# EAGLE board radiosonde_lite_final (EAGLE 9.6.2)
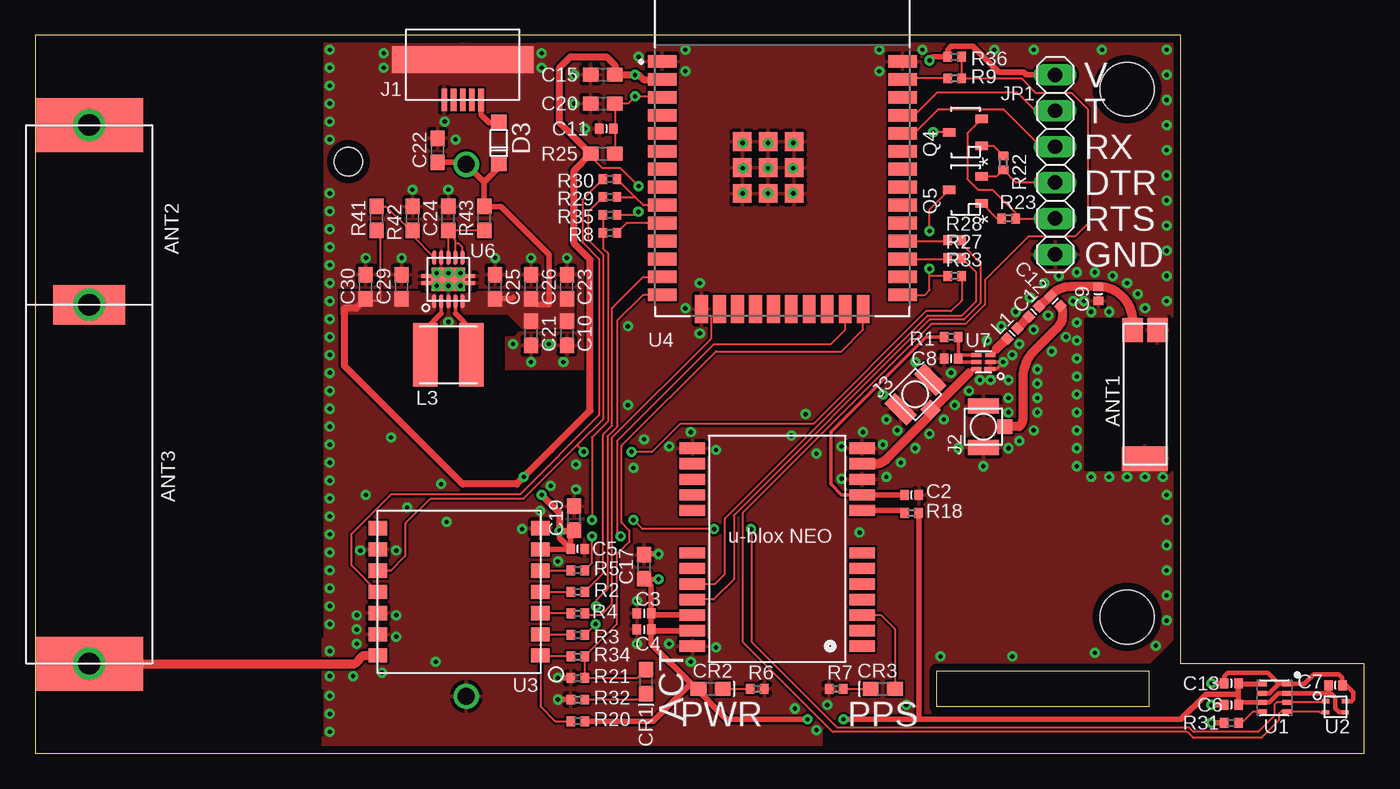
[diagram p0: board, top side]
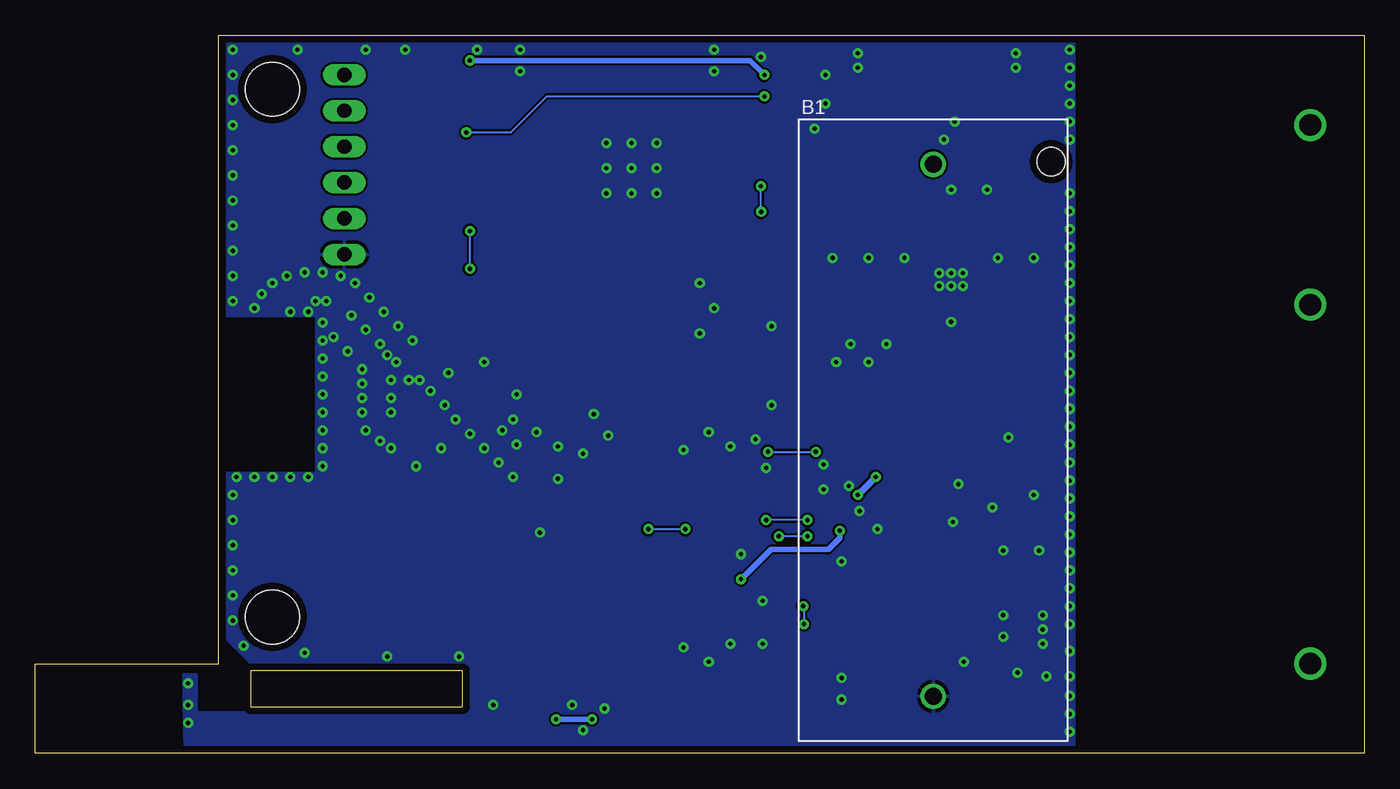
[diagram p1: board, bottom side, seen from below]

Size 93.98 x 50.8 mm. Coordinates in mm from the lower left corner, seen from the top.
Outline: 0,0 93.98,0 93.98,6.35 81.03,6.35 81.03,50.8 0,50.8 0,0
Outline: 78.74,5.84 78.74,3.3 63.75,3.3 63.75,5.84 78.74,5.84
Copper layers (1*16): Top 0.035mm / dielectric 1.5mm / Bottom 0.035mm
Design rules "default *": minimum track width 6mil, minimum drill 10mil, track to track 6mil, track to pad 6mil, pad to pad 6mil, via to via 6mil, smd to smd 6mil, copper to edge 20mil, drill to drill 6mil, minimum pad ring 10mil, minimum via ring 8mil, stop-mask expansion 4mil, vias tented up to drill 12mil, thermal gap 10mil
Net classes: 1 HV: clearance 0.406 mm
Holes 3.81 mm at 77.22,46.99 77.22,9.65
tRestrict: area 28.7,25.9 to 29.7,30; 8 lines
bRestrict: 1 lines

## Footprints (pad centres in the part's own frame; a part is rotated, then mirrored left to right if it is on the bottom)
W3010 = smd 1.7 x 3.2: P$1 -4.55,0 | smd 1.7 x 1.45: P$2 4.55,0.875; P$3 4.55,-0.875
ANT-433-HETH = drill 1.524: IN1 -19.05,0; NC1 19.05,0 | smd 3.81 x 7.62: IN2 -19.05,0; NC2 19.05,0
ANT-916-HETH = drill 1.524: IN1 -12.7,0; NC1 12.7,0 | smd 2.794 x 5.08: IN2 -12.7,0; NC2 12.7,0
BH-123A-A5BJ002 = drill 1.2: N 18.82,0; P -18.82,0 | hole 2: -19,8.34
0402_INDUCTOR = smd 0.6 x 0.7: P$1 0.5,0; P$2 -0.5,0
0603 = smd 1.1 x 1: 1 -0.85,0; 2 0.85,0
0603_DIODE = smd 1.1 x 1: A -0.85,0; K 0.85,0
SOD123(AK) = smd 1.1 x 1.1: A 1.45,0; K -1.45,0
NEO-M8 = smd 1.8 x 0.8: 1 6.4,-7.4; 2 6.4,-6.3; 3 6.4,-5.2; 4 6.4,-4.1; 5 6.4,-3; 6 6.4,-1.9; 7 6.4,-0.8; 8 6.4,2.2; 9 6.4,3.3; 10 6.4,4.4; 11 6.4,5.5; 12 6.4,6.6; 13 -5.6,6.6; 14 -5.6,5.5; 15 -5.6,4.4; 16 -5.6,3.3; 17 -5.6,2.2; 18 -5.6,-0.8; 19 -5.6,-1.9; 20 -5.6,-3; 21 -5.6,-4.1; 22 -5.6,-5.2; 23 -5.6,-6.3; 24 -5.6,-7.4
MICRO_USB = smd 0.4 x 1.6: 1 -1.3,0; 2 -0.65,0; 3 0,0; 4 0.65,0; 5 1.3,0 | smd 10 x 1.9: GND 0,-2.84
U.FL = smd 1.05 x 2.2: G1 -1.475,0; G2 1.475,0 | smd 1 x 1.05: SIG 0,-1.525
1X06 = drill 1.016 long: 1 -6.35,0; 2 -3.81,0; 3 -1.27,0; 4 1.27,0; 5 3.81,0; 6 6.35,0
CY43 = smd 1.75 x 4.5: P$1 1.625,0; P$2 -1.625,0
SOT23-3_CENTERED = smd 0.6 x 0.9: 1 -0.95,-1.15; 2 0.95,-1.15; 3 0,1.15
R0402 = smd 0.6 x 0.7: 1 -0.5,0; 2 0.5,0
BME280 = smd 0.35 x 0.7: 1 -0.975,0.9; 2 -0.325,0.9; 3 0.325,0.9; 4 0.975,0.9; 5 0.975,-0.9; 6 0.325,-0.9; 7 -0.325,-0.9; 8 -0.975,-0.9
SHT40 = smd 0.5 x 0.3: 1 -0.7,0.4; 2 -0.7,-0.4; 3 0.7,-0.4; 4 0.7,0.4
VGDD79S433N0SA = smd 1 x 1.3: 1 -4.5,-5.75; 2 -3,-5.75; 3 -1.5,-5.75; 4 0,-5.75; 5 1.5,-5.75; 6 3,-5.75; 7 4.5,-5.75; 8 4.5,5.75; 9 3,5.75; 10 1.5,5.75; 11 0,5.75; 12 -1.5,5.75; 13 -3,5.75; 14 -4.5,5.75
MODULE_ESP32-WROOM-32D = smd 2 x 0.9: 1 -8.5,5.26; 2 -8.5,3.99; 3 -8.5,2.72; 4 -8.5,1.45; 5 -8.5,0.18; 6 -8.5,-1.09; 7 -8.5,-2.36; 8 -8.5,-3.63; 9 -8.5,-4.9; 10 -8.5,-6.17; 11 -8.5,-7.44; 12 -8.5,-8.71; 13 -8.5,-9.98; 14 -8.5,-11.25; 25 8.5,-11.25; 26 8.5,-9.98; 27 8.5,-8.71; 28 8.5,-7.44; 29 8.5,-6.17; 30 8.5,-4.9; 31 8.5,-3.63; 32 8.5,-2.36; 33 8.5,-1.09; 34 8.5,0.18; 35 8.5,1.45; 36 8.5,2.72; 37 8.5,3.99; 38 8.5,5.26 | smd 0.9 x 2: 15 -5.715,-12.25; 16 -4.445,-12.25; 17 -3.175,-12.25; 18 -1.905,-12.25; 19 -0.635,-12.25; 20 0.635,-12.25; 21 1.905,-12.25; 22 3.175,-12.25; 23 4.445,-12.25; 24 5.715,-12.25 | smd 1.33 x 1.33: 39_1 -2.835,-0.405; 39_2 -1,-0.405; 39_3 0.835,-0.405; 39_4 -2.835,-2.24; 39_5 -1,-2.24; 39_6 0.835,-2.24; 39_7 -2.835,-4.075; 39_8 -1,-4.075; 39_9 0.835,-4.075
S-PVSON-N10 = smd 0.28 x 1: 1 -1,-1.55; 2 -0.5,-1.55; 3 0,-1.55; 4 0.5,-1.55; 5 1,-1.55; 6 1,1.55; 7 0.5,1.55; 8 0,1.55; 9 -0.5,1.55; 10 -1,1.55 | smd 2.4 x 1.65: PG 0,0 | smd 0.7 x 0.28: PG1 -1.55,0.25; PG2 -1.55,-0.25; PG3 1.55,-0.25; PG4 1.55,0.25
6DFN-1X1.6 = smd 0.8 x 0.3: 1 -0.45,0.5 | smd 0.7 x 0.3: 2 -0.5,0; 3 -0.5,-0.5; 4 0.5,-0.5; 5 0.5,0; 6 0.5,0.5

## Placement (x,y rotation side)
ANT1  W3010  [W3010]  78.49,25.4 90 top
ANT2  ANT-433-HETH  [ANT-433-HETH]  3.81,25.4 90 top
ANT3  ANT-916-HETH  [ANT-916-HETH]  3.81,19.05 90 top
B1  BH-123A-A5BJ002  [BH-123A-A5BJ002]  30.48,22.86 270 bottom
C1  DNP  [0402_INDUCTOR]  70.61,31.24 45 top
C2  0.1uF  [0402_INDUCTOR]  61.98,18.29 180 top
C3  0.1uF  [0402_INDUCTOR]  43.05,9.91 0 top
C4  0.1uF  [0402_INDUCTOR]  43.05,8.76 0 top
C5  0.1uF  [0402_INDUCTOR]  38.35,14.48 180 top
C6  0.1uF  [0402_INDUCTOR]  84.58,3.43 0 top
C7  0.1uF  [0402_INDUCTOR]  91.95,4.83 180 top
C8  0.1uF  [0402_INDUCTOR]  64.77,27.94 0 top
C9  DNP  [0402_INDUCTOR]  75.18,32.51 90 top
C10  10uF  [0603]  37.59,29.72 270 top
C11  0.1uF  [0402_INDUCTOR]  40.39,44.2 0 top
C12  DNP  [0402_INDUCTOR]  72.14,32 135 top
C13  0.1uF  [0402_INDUCTOR]  84.58,4.95 0 top
C15  10uF  [0603]  40.13,48.01 180 top
C17  10uF  [0603]  43.05,13.21 90 top
C19  10uF  [0603]  38.1,16.64 90 top
C20  10uF  [0603]  40.13,45.97 180 top
C21  10uF  [0603]  35.05,29.72 270 top
C22  10uF  [0603]  28.45,42.67 90 top
C23  10uF  [0603]  37.59,33.02 90 top
C24  0.1uF  [0603]  29.21,37.85 90 top
C25  10uF  [0603]  32.51,33.02 90 top
C26  10uF  [0603]  35.05,33.02 90 top
C29  10uF  [0603]  25.91,33.02 90 top
C30  10uF  [0603]  23.37,33.02 90 top
CR1  RED  [0603_DIODE]  43.18,5.08 270 top
CR2  RED  [0603_DIODE]  47.75,4.57 0 top
CR3  RED  [0603_DIODE]  59.94,4.57 180 top
D3  SM4007PL  [SOD123(AK)]  32.77,43.18 90 top
IC1  NEO-M8  [NEO-M8]  52.07,14.99 0 top
J1  10104110-0001LF  [MICRO_USB]  30.23,46.23 180 top
J2  CONUFL001-SMD  [U.FL]  67.06,23.11 90 top
J3  CONUFL001-SMD  [U.FL]  62.23,25.4 45 top
JP1  [1X06]  72.14,41.66 90 top
L1  SEL  [0402_INDUCTOR]  69.09,29.72 45 top
L3  2.2uH  [CY43]  29.21,28.19 0 top
Q4  MMBT3904  [SOT23-3_CENTERED]  65.79,43.94 90 top
Q5  MMBT3904  [SOT23-3_CENTERED]  65.79,39.88 90 top
R1  10  [R0402]  64.77,29.46 0 top
R2  10  [R0402]  38.35,11.43 180 top
R3  10  [R0402]  38.35,8.38 180 top
R4  10  [R0402]  38.35,9.91 180 top
R5  10  [R0402]  38.35,12.95 180 top
R6  10k  [R0402]  51.05,4.57 180 top
R7  10k  [R0402]  56.64,4.57 0 top
R8  10  [R0402]  40.64,36.83 180 top
R9  10  [R0402]  65.02,47.75 0 top
R18  10k  [R0402]  61.98,17.02 180 top
R20  10k  [R0402]  38.35,2.29 0 top
R21  10k  [R0402]  38.35,5.33 0 top
R22  10k  [R0402]  68.45,41.78 270 top
R23  10k  [R0402]  68.83,37.85 0 top
R25  1k  [0603]  40.13,42.42 180 top
R27  10  [R0402]  65.02,35.05 0 top
R28  10  [R0402]  65.02,36.32 0 top
R29  DNP  [R0402]  40.64,39.37 180 top
R30  10  [R0402]  40.64,40.64 180 top
R31  10  [R0402]  84.58,2.16 0 top
R32  10k  [R0402]  38.35,3.81 0 top
R33  10  [R0402]  65.02,33.78 0 top
R34  10  [R0402]  38.35,6.86 180 top
R35  10k  [R0402]  40.64,38.1 0 top
R36  10k  [R0402]  65.02,49.28 180 top
R41  150k  [0603]  24.13,37.85 90 top
R42  27k  [0603]  26.67,37.85 270 top
R43  100  [0603]  31.75,37.85 90 top
U1  BMP280  [BME280]  87.63,3.94 270 top
U2  SHT40-AD1B-R2  [SHT40]  91.95,3.3 0 top
U3  VGDD79S433N0SA  [VGDD79S433N0SA]  29.97,11.43 90 top
U4  ESP32-WROOM-32D-N8  [MODULE_ESP32-WROOM-32D]  52.83,43.69 0 top
U6  TPS63000DRCR  [S-PVSON-N10]  29.21,33.53 0 top
U7  AT2659  [6DFN-1X1.6]  67.06,27.69 180 top

## Library data of the parts
ANT1 = ruark2; JLCPCB: C6926293
ANT2 = ruark2; PARTNO: ANT-433-HETH-ND
ANT3 C1-C13 C15 C17 C19-C26 C29 C30 D3 J2 J3 L1 R1-R9 R18 R20-R23 R25 R27-R36 R41-R43 = ruark2
B1 = ruark2; JLCPCB: C5290177
CR1-CR3 = ruark2; PARTNO: 732-4978-1-ND
IC1 = ubloxLib
J1 = ruark2; PARTNO: 609-4052-1-ND
JP1 = pinhead
L3 = ruark2a; JLCPCB: C2929416
Q4 Q5 = ruark2a
U1 = ruark2; PARTNO: 828-1064-1-ND
U2 = ruark2; JLCPCB: C2909890
U3 = ruark2; JLCPCB: C2976576
U4 = ESP32-WROOM-32D; AVAILABILITY: Bad; DESCRIPTION: Bluetooth, WiFi 802.11b/g/n, Bluetooth v4.2 +EDR, Class 1, 2 and 3 Transceiver Module 2.4GHz ~ 2.5GHz Integrated, Trace Surface Mount; MF: Espressif Systems; MP: ESP32-WROOM-32D; PACKAGE: Module Espressif Systems; PRICE: None
U6 = ruark2a; PARTNO: 296-19641-1-ND
U7 = ruark2; JLCPCB: C92450

## Nets
+3V3: C3.P$1 C4.P$1 C5.P$1 C6.P$1 C7.P$1 C13.P$1 C15.1 C17.1 C19.1 C29.1 C30.1 CR2.A IC1.22 IC1.23 JP1.6 R18.1 R20.2 R25.2 R35.2 R36.2 R41.1 U1.2 U1.6 U1.8 U2.3 U3.6 U4.2 U6.1
BUSY: R30.2 U3.11
DIO1: R29.2 R33.2 U3.10
DTR: JP1.3 Q5.2 R22.2
EN: C11.P$1 C20.1 Q4.3 R25.1 U4.3
GND: ANT1.P$1 ANT1.P$3 B1.N C2.P$2 C3.P$2 C4.P$2 C5.P$2 C6.P$2 C7.P$2 C8.P$2 C9.P$2 C10.2 C11.P$2 C13.P$2 C15.2 C17.2 C19.2 C20.2 C21.2 C22.2 C23.2 C24.2 C25.2 C26.2 C29.2 C30.2 IC1.10 IC1.12 IC1.13 IC1.24 J1.5 J1.GND J2.G1 J2.G2 J3.G1 J3.G2 JP1.1 R6.1 R7.1 R21.1 R31.1 R32.1 R42.1 U1.1 U1.7 U2.4 U3.7 U3.9 U3.12 U3.13 U4.1 U4.15 U4.38 U4.39_1 U4.39_2 U4.39_3 U4.39_4 U4.39_5 U4.39_6 U4.39_7 U4.39_8 U4.39_9 U6.3 U6.9 U6.PG U6.PG1 U6.PG2 U6.PG3 U6.PG4 U7.1 U7.2
GPIO36: U4.4
GPIO39: U4.5
GPS_VCC_RF: C8.P$1 R1.2 U7.4 U7.5
HSPI_CLK: R2.2 U3.4
HSPI_CS: R5.2 U3.5
HSPI_MISO: R3.2 U3.2
HSPI_MOSI: R4.2 U3.3
IO0: Q5.3 R33.1 U4.25
N$1: R3.1 U4.14
N$2: IC1.8 R18.2
N$4: C1.P$2 L1.P$1
N$5: R29.1 R30.1 U4.9
N$6: L1.P$2 U7.3
N$7: CR2.K R6.2
N$9: R4.1 U4.16
N$10: R31.2 U1.5
N$11: ANT2.IN1 ANT2.IN2 ANT3.IN1 U3.14
N$12: CR3.K R7.2
N$13: R5.1 U4.23
N$14: ANT1.P$2 C1.P$1 C9.P$1 C12.P$1
N$15: CR1.K R32.2
N$19: U4.36
N$20: R9.1 U4.37
N$21: R8.1 U4.10
N$24: Q4.1 R22.1
N$25: D3.A J1.1
N$26: C2.P$1 IC1.9 R1.1
N$27: Q5.1 R23.1
N$28: CR1.A R21.2 R34.1 U4.24
N$29: R2.1 U4.13
N$30: C12.P$2 J2.SIG
N$31: IC1.11 J3.SIG U7.6
N$44: L3.P$1 U6.4
N$47: L3.P$2 U6.2
N$48: R41.2 R42.2 U6.10
N$49: C24.1 R43.1 U6.6 U6.7 U6.8
NEO_PPS: CR3.A IC1.3
NEO_RX: IC1.21 R28.2
NEO_TX: IC1.20 R27.2
RADIO_RST: R20.1 R34.2 U3.1
RTS: JP1.2 Q4.2 R23.2
RXD0: JP1.4 U4.34
SCL: R9.2 R36.1 U1.4 U2.2
SDA: R8.2 R35.1 U1.3 U2.1
TXD0: JP1.5 U4.35
UART2RX: R27.1 U4.27
UART2TX: R28.1 U4.28
VBATPROT: B1.P C10.1 C21.1 C22.1 C23.1 C25.1 C26.1 D3.K R43.2 U6.5

## Tracks (layer width: path | path; a pad name or v marks a point on that pad's centre or on a via)
+3V3  (via drill 0.3)
  Top 0.152: 43.56,8.64 C4.P$1 | R41.1 24.38,36.74 24.38,32 23.53,32 C30.1 | R35.2 42.42,38.1 v42.64,38.32 | v42.67,40.13 41.4,41.4 40.13,41.4 39.28,42.25 R25.2 | 42.67,48.01 v42.42,48.01 | CR2.A 46.74,4.57 46.35,4.95
  Top 0.305: C6.P$1 85.27,3.61 U1.6 87.27,3.61 87.92,4.26 U1.2 91.44,4.26 | 91.44,4.26 91.62,4.26 91.95,3.94 91.95,3.17 92.22,2.9 U2.3 | C7.P$1 91.45,4.27 91.44,4.26
  Top 0.356: C13.P$1 85.12,4.91 U1.8
  Top 0.406: C13.P$1 85.08,4.19 | 85.08,4.19 C6.P$1 | IC1.22 43.67,9.79 C3.P$1 | IC1.23 43.61,8.69 43.56,8.64 | C3.P$1 C4.P$1 43.55,7.75 46.35,4.95 | C3.P$1 43.55,11.86 C17.1 43.09,12.32 v44.07,12.32 | 85.08,4.19 82.8,4.19 81.03,2.41 v57.15,2.41 62.48,2.41 R18.1 | v54.61,2.41 48.9,2.41 46.35,4.95 | C5.P$1 37.81,14.43 U3.6 | C19.1 37.85,15.54 C5.P$1 | R20.2 43.69,2.29 46.35,4.95 | C5.P$1 37.08,15.25 v37.08,15.75 | v63.25,49.02 63.5,49.28 R36.2 64.52,49.79 64.77,50.04 66.29,50.04 68.15,48.18 69.9,48.18 70.08,48.01 JP1.6
  Top 0.508: C30.1 22.69,31.5 21.84,31.5 21.84,27.43 30.23,19.05 34.04,19.05 v34.54,19.56 | v35.81,18.29 37.08,17.02 v37.08,15.75 38.06,15.75 C19.1 | v34.54,19.56 39.24,24.26 39.24,34.92 38.1,36.07 38.1,41.24 R25.2 37.08,44.62 37.08,48.51 37.85,49.28 40.39,49.28 40.98,48.68 C15.1 v42.42,48.01 | U4.2 43,47.68 42.67,48.01 | 36.48,21.49 v34.54,19.56
  Bottom 0.152: v42.64,38.32 42.67,38.35 v42.67,40.13
  Bottom 0.406: v57.15,2.41 v54.61,2.41 | v44.07,12.32 41.96,14.43 37.89,14.43 37.08,15.24 v37.08,15.75 | v42.42,48.01 43.43,49.02 v63.25,49.02
  Bottom 0.508: v34.54,19.56 v35.81,18.29
  pour Top (no thermals): 28.32,32.51 27.3,32.51 27.18,32.64 21.59,32.64 21.59,31.11 28.07,31.11 28.32,31.37
BUSY
  Top 0.152: U3.11 22.35,13.3 22.35,15.53 25.16,18.34 34.29,18.34 39.88,23.93 39.88,34.97 38.7,36.16 38.7,39.2 R30.2
DIO1  (via drill 0.3)
  Top 0.152: 65.55,33.76 R33.2 65.52,32.05 64.77,31.29 62.99,31.29 55.02,23.32 45.6,23.32 43.62,21.34 v42.16,21.34 | U3.10 25.12,12.93 26.16,13.97 26.16,16.26 27.94,18.03 34.54,18.03 38.35,21.84 | R29.2 39.12,38.35 39.12,36.32 40.18,35.26 40.18,23.67 38.35,21.84 | v38.79,21.34 38.35,21.77 38.35,21.84
  Bottom 0.152: v42.16,21.34 v38.79,21.34
DTR
  Top 0.152: Q5.2 68,40.83 R22.2 69.35,40.39 JP1.3
EN  (via drill 0.3)
  Top 0.152: U4.3 44.26,46.48 v42.42,46.48 41.91,45.97 C20.1 40.98,44.29 C11.P$1 40.98,44.1 R25.1 | Q4.3 v63.5,43.94
  Bottom 0.152: v63.5,43.94 60.33,43.94 57.78,46.48 v42.42,46.48
GND  (via drill 0.3)
  Top 0.254: U7.2 v68.45,27.69 67.95,27.19 U7.1
  Top 0.305: U1.7 87.28,4.26 87.93,4.91 | 87.93,4.91 U1.1 89.75,4.91 90.42,5.59 92.2,5.59 92.45,5.34 C7.P$2 92.71,4.83 93.22,4.32 93.22,3.81 93.11,3.7 U2.4 | C13.P$2 84.08,5.44 84.33,5.69 87.15,5.69 87.93,4.91
  Top 0.406: R31.1 v83.19,2.16 | C6.P$2 v83.19,3.43 | C13.P$2 v83.19,4.95 | C17.2 43.09,14.1 v44.07,14.1 | R21.1 v36.96,5.33 | R32.1 v36.96,3.81
  other vias: 75.95,31.24 74.68,31.24 73.66,30.48 73.66,29.21 73.66,27.94 73.66,26.67 73.66,25.4 73.66,24.13 73.66,22.86 73.66,21.59 73.66,20.32 74.68,19.56 75.95,19.56 77.22,19.56 78.49,19.56 79.76,19.56 20.83,7.24 20.83,5.46 78.49,31.5 77.98,32.51 77.22,33.27 76.2,33.78 74.93,34.04 73.66,34.04 72.39,33.78 71.37,33.27 70.36,32.26 69.34,31.24 68.33,30.23 67.31,29.21 69.6,28.96 70.61,29.97 71.63,30.99 73.41,32 74.17,32 72.9,29.46 71.88,28.45 70.87,27.18 69.09,28.19 68.83,26.42 68.83,24.13 68.83,25.15 70.87,25.15 70.87,26.16 70.87,24.13 68.83,21.59 65.28,21.59 67.06,20.32 67.56,26.42 66.04,25.65 66.8,26.42 65.02,24.64 64.26,23.62 63.25,22.61 62.23,21.59 61.21,20.57 60.2,19.56 60.96,22.86 59.94,21.84 64.77,26.92 62.23,27.69 59.94,25.4 60.2,23.62 69.6,22.1 70.61,22.86 48.13,21.46 46.35,22.73 44.83,21.72 44.83,7.75 46.35,6.48 48.13,7.49 58.55,22.73 57.02,19.43 57.02,21.72 35.69,17.14 34.42,15.88 22.73,7.75 22.48,5.46 24.51,5.71 25.53,8.26 25.53,9.78 22.73,9.78 22.73,8.76 22.99,14.35 25.53,14.35 28.37,33.99 28.37,33.07 30.05,33.99 30.05,33.07 29.21,33.99 29.21,33.07 25.91,35.05 23.37,35.05 26.67,39.88 29.21,39.88 32.51,35.05 35.05,35.05 37.59,35.05 29.21,30.53 20.83,49.78 20.83,48.51 20.83,47.24 20.83,45.97 20.83,44.7 20.83,43.43 20.83,39.62 20.83,38.35 20.83,37.08 20.83,35.81 20.83,34.54 20.83,33.27 20.83,32 20.83,30.73 20.83,29.46 20.83,28.19 20.83,26.92 20.83,25.65 20.83,24.38 20.83,23.11 20.83,21.84 20.83,20.57 20.83,19.3 20.83,18.03 20.83,16.76 20.83,10.41 20.83,9.14 20.83,4.06 20.83,2.79 20.83,1.52 36.45,18.92 38.23,18.67 36.96,13.59 42.55,10.79 42.55,7.75 26.29,17.4 29.08,16.38 28.32,6.48 38.1,45.97 38.86,44.2 50.04,43.18 51.82,43.18 53.59,43.18 53.59,41.4 53.59,39.62 51.82,39.62 51.82,41.4 50.04,41.4 50.04,39.62 41.91,24.64 41.91,30.23 25.15,22.35 38.1,48.01 38.23,20.45 43.05,22.23 42.29,20.19 42.67,49.28 45.97,48.26 45.97,49.78 59.69,49.78 59.69,48.26 62.74,49.78 67.82,49.78 46.99,29.72 46.99,33.27 45.97,31.5 20.83,15.49 20.83,14.22 20.83,12.95 20.83,11.68 55.24,1.65 53.72,3.17 56.01,3.43 61.59,3.43 55.24,21.21 53.47,22.48 54.48,24 58.29,15.62 36.32,28.96 33.78,28.96 35.05,27.69 37.34,27.69 35.81,49.53 35.81,48.51 24.64,49.53 24.64,48.51 28.96,44.7 29.72,43.43 80.01,16.51 80.01,14.73 80.01,12.95 74.93,7.11 64.01,6.86 69.09,6.86 80.01,18.29 80.01,32 80.01,33.78 80.01,35.56 80.01,37.34 80.01,39.12 80.01,40.89 80.01,42.67 80.01,44.45 80.01,46.23 80.01,48.01 80.01,49.78 80.01,11.18 80.01,9.4 79.25,7.62 75.44,49.78 70.61,49.78 28.7,19.05 23.37,18.29
  pour Top (rank 3): 80.9,50.67 80.9,0.12 20.32,0 20.32,8.13 20.45,50.55
  pour Bottom: 20.57,50.67 80.9,50.67 80.9,6.22 78.87,6.22 78.87,2.92 82.42,2.92 82.55,3.05 82.55,5.59 83.57,5.59 83.44,0.13 20.45,0.13 20.45,50.55
  pour Top (no thermals): 80.01,29.21 80.01,31.5 78.23,31.5 78.23,30.99 78.74,30.99 78.74,29.21
  pour Top (no thermals): 80.01,19.3 80.01,21.59 76.45,21.59 76.45,19.3
  pour Top (no thermals): 24.38,50.29 24.38,47.75 36.32,47.75 36.32,50.29
GPS_VCC_RF
  Top 0.254: R1.2 C8.P$1 | U7.4 65.52,28.19 C8.P$1 | U7.5 65.52,27.69 C8.P$1
HSPI_CLK
  Top 0.152: U3.4 R2.2
HSPI_CS
  Top 0.152: R5.2 37.83,12.93 U3.5
HSPI_MISO
  Top 0.152: U3.2 37.81,8.43 R3.2
HSPI_MOSI
  Top 0.152: R4.2 35.75,9.91 U3.3
IO0  (via drill 0.3)
  Top 0.152: U4.25 62.92,32.44 63.25,32.77 63.25,33.78 | 63.25,33.78 v63.25,34.29 | v63.25,36.96 63.25,38.49 Q5.3 | R33.1 63.25,33.78
  Bottom 0.152: v63.25,34.29 v63.25,36.96
N$1  (via drill 0.3)
  Top 0.152: U4.14 42.98,32.44 41.15,30.61 41.15,23.11 40.46,22.43 40.46,11.63 39.66,10.83 v39.66,10.41 | v39.62,9.14 38.86,8.38 R3.1
  Bottom 0.152: v39.66,10.41 39.62,10.38 v39.62,9.14
N$2
  Top 0.406: IC1.8 61.07,17.19 arc-45 R18.2
N$4
  Top 0.645: C1.P$2 L1.P$1
N$5
  Top 0.152: U4.9 43,38.79 42.42,39.37 | R30.1 42.42,39.37 | R29.1 42.42,39.37
N$6
  Top 0.305: U7.3 67.94,28.57
  Top 0.645: L1.P$2 67.94,28.57
N$7
  Top 0.152: CR2.K R6.2
N$9
  Top 0.152: U4.16 47.8,30.85 47.8,29.33 40.77,22.3 40.77,10.54 40.01,9.78 38.98,9.78 R4.1
N$10
  Top 0.152: R31.2 85.34,2.16 86.15,2.96 U1.5
N$11
  Top 0.645: ANT3.IN1 22.61,6.35 23.19,6.93 U3.14
N$12
  Top 0.152: R7.2 CR3.K
N$13  (via drill 0.3)
  Top 0.152: v41.4,15.37 41.15,15.62 41.15,22.1 48.01,28.96 56.26,28.96 57.28,29.97 U4.23 | v39.37,15.37 39.37,14.94 39.38,14.92 39.38,13.48 R5.1
  Bottom 0.152: v39.37,15.37 v41.4,15.37
N$14
  Top 0.254: C9.P$1
  Top 0.645: ANT1.P$2 77.61,30.59 arc90 C9.P$1 73.15,33.02 arc45 71.94,32.52 C12.P$1 71.06,31.63 arc-45 C1.P$1
N$15
  Top 0.152: R32.2 42.76,3.81 CR1.K
N$20
  Top 0.152: R9.1 61.41,47.75 U4.37
N$21
  Top 0.152: U4.10 41.83,37.52 R8.1
N$24
  Top 0.152: Q4.1 67.74,42.99 R22.1
N$25
  Top 0.406: J1.1 31.53,45.18 32.08,44.63 D3.A
N$26
  Top 0.254: IC1.9 57.02,18.29 56.26,19.05 56.26,22.73 62.99,29.46 R1.1
  Top 0.406: C2.P$1 IC1.9 arc45 IC1.9
N$27
  Top 0.152: R23.1 68.02,37.85 Q5.1
N$28
  Top 0.152: CR1.A 42.58,5.33 R21.2 R34.1 41.15,9.15 41.15,14.1 42.04,14.99 42.04,15.75 41.45,16.33 41.45,21.77 48.13,28.45 57.02,28.45 58.55,29.97 U4.24
N$29
  Top 0.152: U4.13 42.98,33.71 40.79,31.52 40.79,23.19 40.16,22.55 40.16,12.73 R2.1
N$30
  Top 0.645: C12.P$2 arc-45 72.64,31.28 72.64,30.99 arc-45 72.28,30.12 70.59,28.43 arc45 69.85,26.63 69.85,23.73 arc-45 69.6,23.11 J2.SIG
N$31
  Top 0.305: U7.6 arc45 66.12,27.01 66.04,26.92
  Top 0.645: IC1.11 59.37,20.49 arc45 60.2,20.83 63.04,23.67 arc45 63.22,24.1 arc45 J3.SIG arc45 63.53,24.41 66.04,26.92
N$44
  Top 0.254: U6.4 29.71,31.12 | 30.84,30 L3.P$1
  Top 0.406: 29.71,31.12 30.84,30
N$47
  Top 0.254: U6.2 28.71,31.12 | 27.59,30 L3.P$2
  Top 0.406: 28.71,31.12 27.59,30
N$48
  Top 0.152: U6.10 26.67,36.62 26.67,36.83 | 26.67,36.83 R42.2 | R41.2 24.8,38.7 26.67,36.83
N$49
  Top 0.152: U6.8 29.21,36.83 | 29.21,36.83 C24.1 R43.1 | U6.7 29.71,36.07 | 29.71,36.07 29.71,36.33 29.21,36.83 | U6.6 30.21,35.82 29.96,36.07 29.71,36.07
NEO_PPS
  Top 0.152: IC1.3 59.81,9.79 60.79,8.8 CR3.A
NEO_RX
  Top 0.152: R28.2 65.52,36.02 66.85,34.7 66.85,31.88 65.66,30.68 63.24,30.68 49.4,16.84 49.4,12.32 47.97,10.89 IC1.21
NEO_TX
  Top 0.152: IC1.20 48.05,11.99 48.77,12.7 48.77,16.64 63.12,30.99 65.53,30.99 66.55,32 66.55,34.03 R27.2
RADIO_RST
  Top 0.152: R34.2 35.79,6.86 U3.1 35.72,3.33 36.77,2.29 R20.1
RTS
  Top 0.152: JP1.2 R23.2 69.33,38.23 67.69,39.88 66.67,39.88 65.91,40.64 65.91,43.87 Q4.2
RXD0
  Top 0.152: U4.34 62.16,43.87 63.88,45.59 68.45,45.59 71.12,42.93 JP1.4
SCL
  Top 0.152: R36.1 R9.2 69.72,47.75 70.74,46.74 73.28,46.74 74.42,45.59 74.42,37.47 73.53,36.58 70.23,36.58 67.16,33.5 67.16,31.75 65.78,30.38 63.37,30.38 50.04,17.05 50.04,7.87 56.39,1.52 81.48,1.52 81.92,1.09 86.69,1.09 87.94,2.34 87.94,2.79 88.1,2.96 U1.4 90.81,2.96 90.87,2.9 U2.2
SDA  (via drill 0.3)
  Top 0.152: R8.2 40.08,36.83 | U2.1 91.16,3.61 U1.3 87.81,3.61 87.63,3.43 87.63,2.67 86.49,1.52 81.91,1.52 81.61,1.83 56.72,1.83 50.67,7.87 50.67,15.82 v50.62,15.88 | v48.01,15.88 42.93,15.88 v42.29,16.51 | R35.1 R8.2 | R8.2 40.14,35.73 40.49,35.38 40.49,23.47 39.37,22.35 v39.37,16.51
  Bottom 0.152: v39.37,16.51 v42.29,16.51 | v50.62,15.88 v48.01,15.88
TXD0
  Top 0.152: 61.66,45.47 U4.35 62.16,45.14 63.75,46.74 69.47,46.74 70.74,45.47 JP1.5
UART2RX
  Top 0.152: U4.27 64.45,34.98 R27.1
UART2TX
  Top 0.152: U4.28 64.45,36.25 R28.1
VBATPROT
  Top 0.406: 33.78,32.26 33.69,32.17 C25.1 | C22.1 30.34,41.82 B1.P 31.75,40.41 | 31.75,40.41 R43.2 32.93,38.7 36.32,35.31 36.32,31.75 35.47,31.75 C26.1 | D3.K 32.77,41.43 31.75,40.41
  pour Top (rank 2, no thermals): 30.1,32.51 30.1,31.37 30.35,31.11 33.4,31.11 34.42,30.1 38.1,30.1 38.1,32.64 31.24,32.64 31.11,32.51

## Text on the board
tPlace: V | T | RX | DTR | RTS | GND | ACT | PWR | PPS
tStop: Radiosonde V1